# EAGLE board PLCC28 to DIP24 MBC-PIC (EAGLE 4.16)
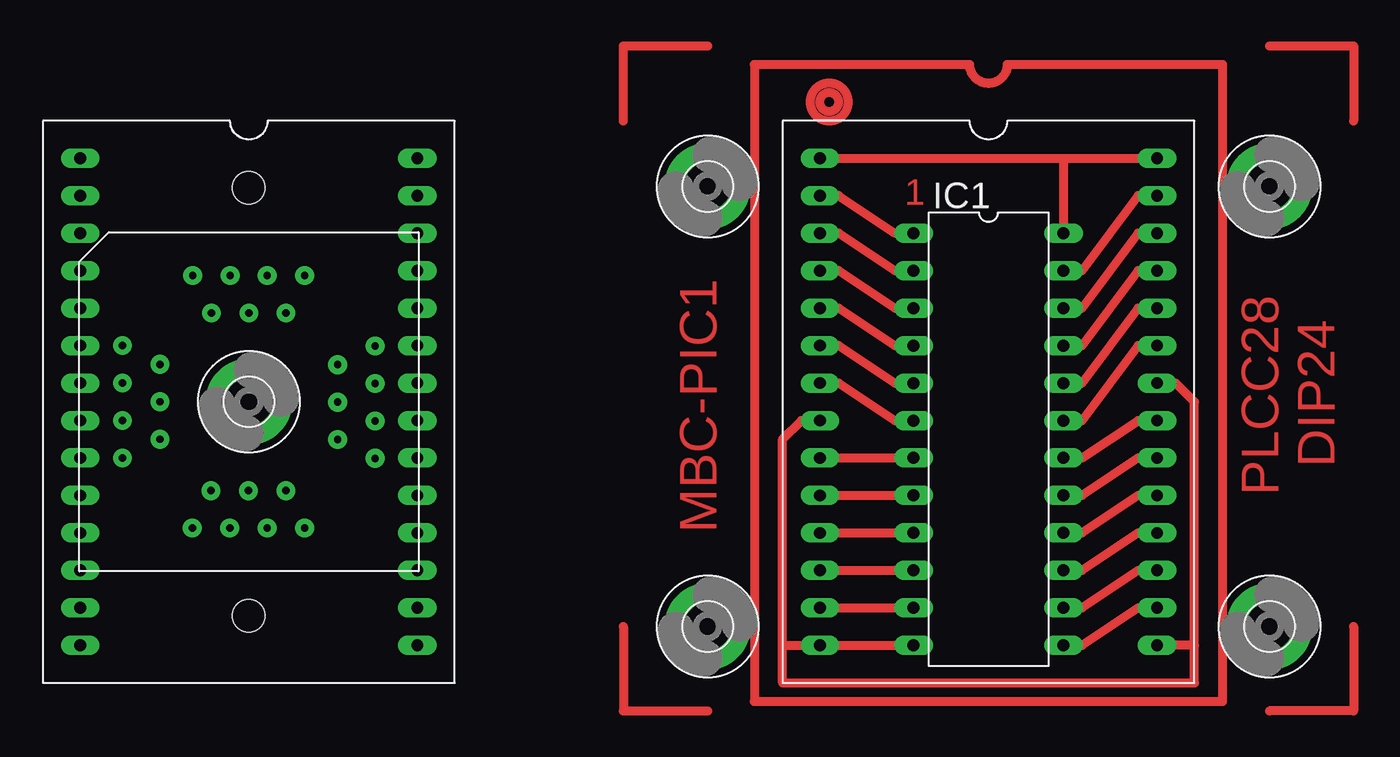
[diagram p0: board, top side]
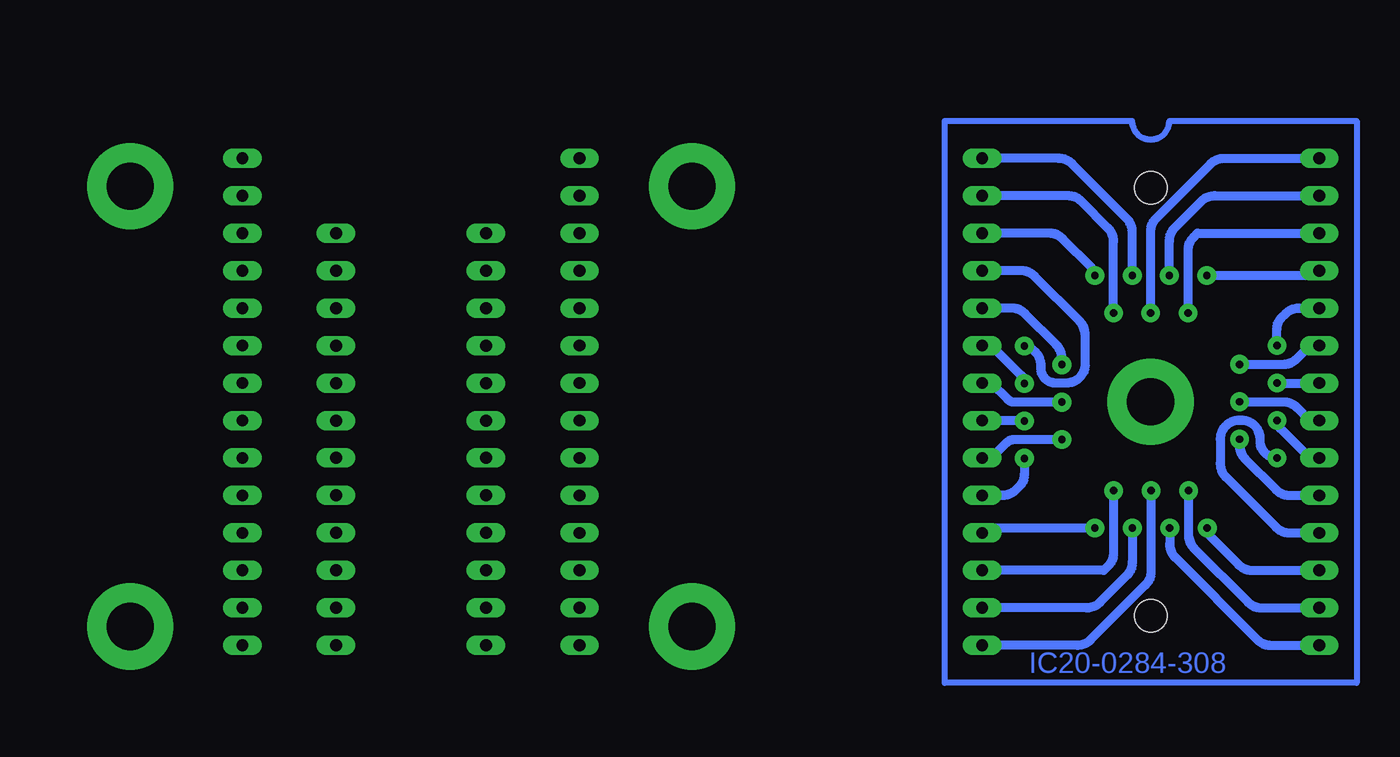
[diagram p1: board, bottom side, seen from below]

No outline drawn. Coordinates in mm, seen from the top.
Copper layers (1*16): Top 0.035mm / dielectric 1.5mm / Bottom 0.035mm
Design rules "default": minimum track width 10mil, minimum drill 24mil, track to track 8mil, track to pad 8mil, pad to pad 8mil, via to via 8mil, smd to smd 8mil, copper to edge 40mil, drill to drill 8mil, minimum pad ring 10mil, minimum via ring 8mil, stop-mask expansion 4mil, vias tented up to drill 0mil, thermal gap 10mil

## Footprints (pad centres in the part's own frame; a part is rotated, then mirrored left to right if it is on the bottom)
3,2-PAD = drill 3.2 pad 5.842 round: B3,2 0,0
DIL24-4 = drill 0.813 long: 1 -13.97,-5.08; 2 -11.43,-5.08; 3 -8.89,-5.08; 4 -6.35,-5.08; 5 -3.81,-5.08; 6 -1.27,-5.08; 7 1.27,-5.08; 8 3.81,-5.08; 9 6.35,-5.08; 10 8.89,-5.08; 11 11.43,-5.08; 12 13.97,-5.08; 13 13.97,5.08; 14 11.43,5.08; 15 8.89,5.08; 16 6.35,5.08; 17 3.81,5.08; 18 1.27,5.08; 19 -1.27,5.08; 20 -3.81,5.08; 21 -6.35,5.08; 22 -8.89,5.08; 23 -11.43,5.08; 24 -13.97,5.08
IC120 = drill 0.5 pad 1.27 round: 1 0,6.025; 2 -1.27,8.565; 3 -2.54,6.025; 4 -3.81,8.565; 5 -8.565,3.81; 6 -6.025,2.54; 7 -8.565,1.27; 8 -6.025,0; 9 -8.565,-1.27; 10 -6.025,-2.54; 11 -8.565,-3.81; 12 -3.835,-8.565; 13 -2.565,-6.025; 14 -1.295,-8.565; 15 -0.025,-6.025; 16 1.245,-8.565; 17 2.515,-6.025; 18 3.785,-8.565; 19 8.565,-3.835; 20 6.025,-2.565; 21 8.565,-1.295; 22 6.025,-0.025; 23 8.565,1.245; 24 6.025,2.515; 25 8.565,3.785; 26 3.785,8.565; 27 2.515,6.025; 28 1.245,8.565 | drill 0.8 round: P$29 0,14.5; P$30 0,-14.5 | hole 2.2: 0,14.5; 0,-14.5
DIP28-9 = drill 0.8 long: 1 -11.43,16.51; 2 -11.43,13.97; 3 -11.43,11.43; 4 -11.43,8.89; 5 -11.43,6.35; 6 -11.43,3.81; 7 -11.43,1.27; 8 -11.43,-1.27; 9 -11.43,-3.81; 10 -11.43,-6.35; 11 -11.43,-8.89; 12 -11.43,-11.43; 13 -11.43,-13.97; 14 -11.43,-16.51; 15 11.43,-16.51; 16 11.43,-13.97; 17 11.43,-11.43; 18 11.43,-8.89; 19 11.43,-6.35; 20 11.43,-3.81; 21 11.43,-1.27; 22 11.43,1.27; 23 11.43,3.81; 24 11.43,6.35; 25 11.43,8.89; 26 11.43,11.43; 27 11.43,13.97; 28 11.43,16.51

## Placement (x,y rotation side)
H1  MOUNT-PAD-ROUND3.2  [3,2-PAD]  46.35,21.59 0 top
H2  MOUNT-PAD-ROUND3.2  [3,2-PAD]  84.45,21.59 0 top
H3  MOUNT-PAD-ROUND3.2  [3,2-PAD]  46.35,51.44 0 top
H4  MOUNT-PAD-ROUND3.2  [3,2-PAD]  84.45,51.44 0 top
H5  MOUNT-PAD-ROUND3.2  [3,2-PAD]  15.24,36.83 0 top
IC1  [DIL24-4]  65.41,34.29 270 top
U$1  PLCC28  [IC120]  15.24,36.83 0 top
U$2  DIP28-9  [DIP28-9]  15.24,36.83 0 top
U$3  DIP28-9  [DIP28-9]  65.41,36.83 0 top

## Library data of the parts
H1-H5 = holes
IC1 = ic-package
U$1-U$3 = GB-Spcl

## Nets
GND: IC1.12 U$3.8 U$3.14 U$3.15 U$3.22
N$1: U$1.5 U$2.5
N$2: U$1.4 U$2.4
N$3: U$1.3 U$2.3
N$4: U$1.2 U$2.2
N$5: U$1.1 U$2.1
N$6: U$1.6 U$2.6
N$7: U$1.7 U$2.7
N$8: U$1.8 U$2.8
N$9: U$1.9 U$2.9
N$10: U$1.10 U$2.10
N$11: U$1.11 U$2.11
N$12: U$1.12 U$2.12
N$13: U$1.13 U$2.13
N$14: U$1.14 U$2.14
N$15: U$1.25 U$2.25
N$16: U$1.24 U$2.24
N$17: U$1.23 U$2.23
N$18: U$1.22 U$2.22
N$19: U$1.21 U$2.21
N$20: U$1.20 U$2.20
N$21: U$1.19 U$2.19
N$22: U$1.18 U$2.18
N$23: U$1.17 U$2.17
N$24: U$1.16 U$2.16
N$25: U$1.15 U$2.15
N$26: U$1.26 U$2.26
N$27: U$1.27 U$2.27
N$28: U$1.28 U$2.28
N$29: IC1.1 U$3.2
N$30: IC1.2 U$3.3
N$31: IC1.3 U$3.4
N$32: IC1.4 U$3.5
N$33: IC1.5 U$3.6
N$34: IC1.6 U$3.7
N$35: IC1.7 U$3.9
N$36: IC1.8 U$3.10
N$37: IC1.9 U$3.11
N$38: IC1.10 U$3.12
N$39: IC1.11 U$3.13
N$40: IC1.14 U$3.17
N$41: IC1.15 U$3.18
N$42: IC1.16 U$3.19
N$43: IC1.17 U$3.20
N$44: IC1.18 U$3.21
N$45: IC1.19 U$3.23
N$46: IC1.20 U$3.24
N$47: IC1.21 U$3.25
N$48: IC1.22 U$3.26
N$49: IC1.23 U$3.27
N$50: IC1.13 U$3.16
VCC: IC1.24 U$3.1 U$3.28

## Tracks (layer width: path | path; a pad name or v marks a point on that pad's centre or on a via)
GND
  Top 0.61: U$3.22 78.11,38.1 79.38,36.83 79.38,20.32 | 79.38,20.32 U$3.15 | IC1.12 U$3.14 51.44,20.32 | U$3.8 52.7,35.56 51.44,34.29 51.44,20.32 | 51.44,20.32 51.44,17.78 79.38,17.78 79.38,20.32
N$1
  Bottom 0.61: U$1.5 6.67,41.76 arc45 6.35,42.55 6.09,42.81 arc45 5.19,43.18 U$2.5
N$2
  Bottom 0.61: U$1.4 4.59,45.4 arc-45 U$2.4
N$3
  Bottom 0.61: U$1.3 12.7,47.1 arc45 12.33,48 12.06,48.26 U$2.3
N$4
  Bottom 0.61: U$1.2 13.97,47.73 arc45 13.6,48.63 11.8,50.43 arc45 10.9,50.8 U$2.2
N$5
  Bottom 0.61: U$1.1 15.24,48.37 arc45 14.87,49.27 11.17,52.97 arc45 10.27,53.34 U$2.1
N$6
  Bottom 0.61: U$1.6 6.24,39.37 arc-45 5.34,39.74 4.45,40.64 U$2.6
N$7
  Bottom 0.61: U$1.7 U$2.7
N$8
  Bottom 0.61: U$1.8 6.24,36.83 arc45 5.34,36.46 4.45,35.56 U$2.8
N$9
  Bottom 0.61: U$1.9 arc-45 6.46,35.03 4.45,33.02 U$2.9
N$10
  Bottom 0.61: U$1.10 9.21,33.87 arc-45 8.84,32.97 6.72,30.85 arc-45 5.82,30.48 U$2.10
N$11
  Bottom 0.61: U$1.11 arc90 7.81,34.16 7.81,34.31 arc-90 9.07,35.57 9.25,35.57 arc-90 10.52,34.3 10.52,32.64 arc-45 10.15,31.74 6.72,28.31 arc-45 5.82,27.94 U$2.11
N$12
  Bottom 0.61: U$1.12 arc-45 11.16,27.67 9.26,25.77 arc-45 8.36,25.4 U$2.12
N$13
  Bottom 0.61: U$1.13 12.68,27.81 arc-45 12.3,26.91 8.63,23.23 arc-45 7.73,22.86 U$2.13
N$14
  Bottom 0.61: U$1.14 13.95,27.17 arc-45 13.57,26.27 7.99,20.69 arc-45 7.09,20.32 U$2.14
N$15
  Bottom 0.61: U$2.25 24.02,45.72 arc45 23.12,45.35 20.06,42.28 arc45 19.68,41.38 19.68,39.37 arc90 20.95,38.1 21.69,38.1 arc90 22.68,39.09 22.68,39.3 arc-45 23.05,40.2 23.5,40.64 arc45 23.55,40.62 U$1.25
N$16
  Bottom 0.61: U$1.24 21.27,39.79 arc-45 21.64,40.69 23.76,42.81 arc-45 24.66,43.18 U$2.24
N$17
  Bottom 0.61: U$1.23 23.8,38.15 arc-45 23.99,38.6 26.04,40.64 U$2.23
N$18
  Bottom 0.61: U$1.22 24.48,36.8 arc45 24.93,36.99 26.04,38.1 U$2.22
N$19
  Bottom 0.61: 26.64,35.53 U$2.21 arc-45 26.61,35.53 U$1.21
N$20
  Bottom 0.61: U$1.20 24.53,34.27 arc-45 24.98,34.08 26.04,33.02 U$2.20
N$21
  Bottom 0.61: U$1.19 23.8,31.9 arc45 24.13,31.11 24.39,30.85 arc45 25.29,30.48 U$2.19
N$22
  Bottom 0.61: U$1.18 25.89,28.27 arc-45 U$2.18
N$23
  Bottom 0.61: U$1.17 17.75,26.59 arc45 18.13,25.69 18.41,25.4 U$2.17
N$24
  Bottom 0.61: U$1.16 16.48,25.95 arc45 16.86,25.05 18.68,23.23 arc45 19.58,22.86 U$2.16
N$25
  Bottom 0.61: U$1.15 15.21,25.32 arc45 15.59,24.42 19.31,20.69 arc45 20.21,20.32 U$2.15
N$26
  Bottom 0.61: U$1.26 arc-45 19.24,45.91 21.22,47.89 arc-45 22.12,48.26 U$2.26
N$27
  Bottom 0.61: U$1.27 17.75,47.71 arc-45 18.13,48.61 19.95,50.43 arc-45 20.85,50.8 U$2.27
N$28
  Bottom 0.61: U$1.28 16.48,48.34 arc-45 16.86,49.24 20.58,52.97 arc-45 21.48,53.34 U$2.28
N$29
  Top 0.61: U$3.2 55.24,50.8 59.05,48.26 IC1.1
N$30
  Top 0.61: U$3.3 55.24,48.26 59.05,45.72 IC1.2
N$31
  Top 0.61: U$3.4 55.24,45.72 59.05,43.18 IC1.3
N$32
  Top 0.61: U$3.5 55.24,43.18 59.05,40.64 IC1.4
N$33
  Top 0.61: U$3.6 55.24,40.64 59.05,38.1 IC1.5
N$34
  Top 0.61: U$3.7 55.24,38.1 59.05,35.56 IC1.6
N$35
  Top 0.61: U$3.9 IC1.7
N$36
  Top 0.61: U$3.10 IC1.8
N$37
  Top 0.61: U$3.11 IC1.9
N$38
  Top 0.61: U$3.12 IC1.10
N$39
  Top 0.61: U$3.13 IC1.11
N$40
  Top 0.61: U$3.17 75.56,25.4 71.75,22.86 IC1.14
N$41
  Top 0.61: U$3.18 75.56,27.94 71.75,25.4 IC1.15
N$42
  Top 0.61: U$3.19 75.56,30.48 71.75,27.94 IC1.16
N$43
  Top 0.61: U$3.20 75.56,33.02 71.75,30.48 IC1.17
N$44
  Top 0.61: U$3.21 75.56,35.56 71.75,33.02 IC1.18
N$45
  Top 0.61: U$3.23 75.56,40.64 71.75,35.56 IC1.19
N$46
  Top 0.61: U$3.24 75.56,43.18 71.75,38.1 IC1.20
N$47
  Top 0.61: U$3.25 75.56,45.72 71.75,40.64 IC1.21
N$48
  Top 0.61: U$3.26 75.56,48.26 71.75,43.18 IC1.22
N$49
  Top 0.61: U$3.27 75.56,50.8 71.75,45.72 IC1.23
N$50
  Top 0.61: U$3.16 75.56,22.86 71.75,20.32 IC1.13
N$51
  Top 0.61: 66.67,59.69 arc-180 64.14,59.69 49.53,59.69 49.53,16.51 81.28,16.51 81.28,59.69 66.67,59.69
N$52
  Top 0.61: 90.17,55.88 90.17,60.96 84.45,60.96
N$53
  Top 0.61: 40.64,21.59 40.64,15.88 46.35,15.88
N$54
  Top 0.61: 90.17,21.59 90.17,15.88 84.45,15.88
N$55
  Top 0.61: 46.35,60.96 40.64,60.96 40.64,55.88
N$56
  Bottom 0.406: 13.97,55.88 1.27,55.88 1.27,17.78 29.21,17.78 29.21,55.88 16.51,55.88 arc-180 13.97,55.88
VCC
  Top 0.61: U$3.1 70.48,53.34 | 70.48,53.34 U$3.28 | 70.48,53.34 IC1.24
(copper drawn outside any net)
  shapes: Top circle x2

## Text on the board
Top: 1 | DIP24 | PLCC28 | MBC-PIC1
Bottom: IC20-0284-308